# EAGLE board Skematik Sistem Minimum (EAGLE 9.6.2)
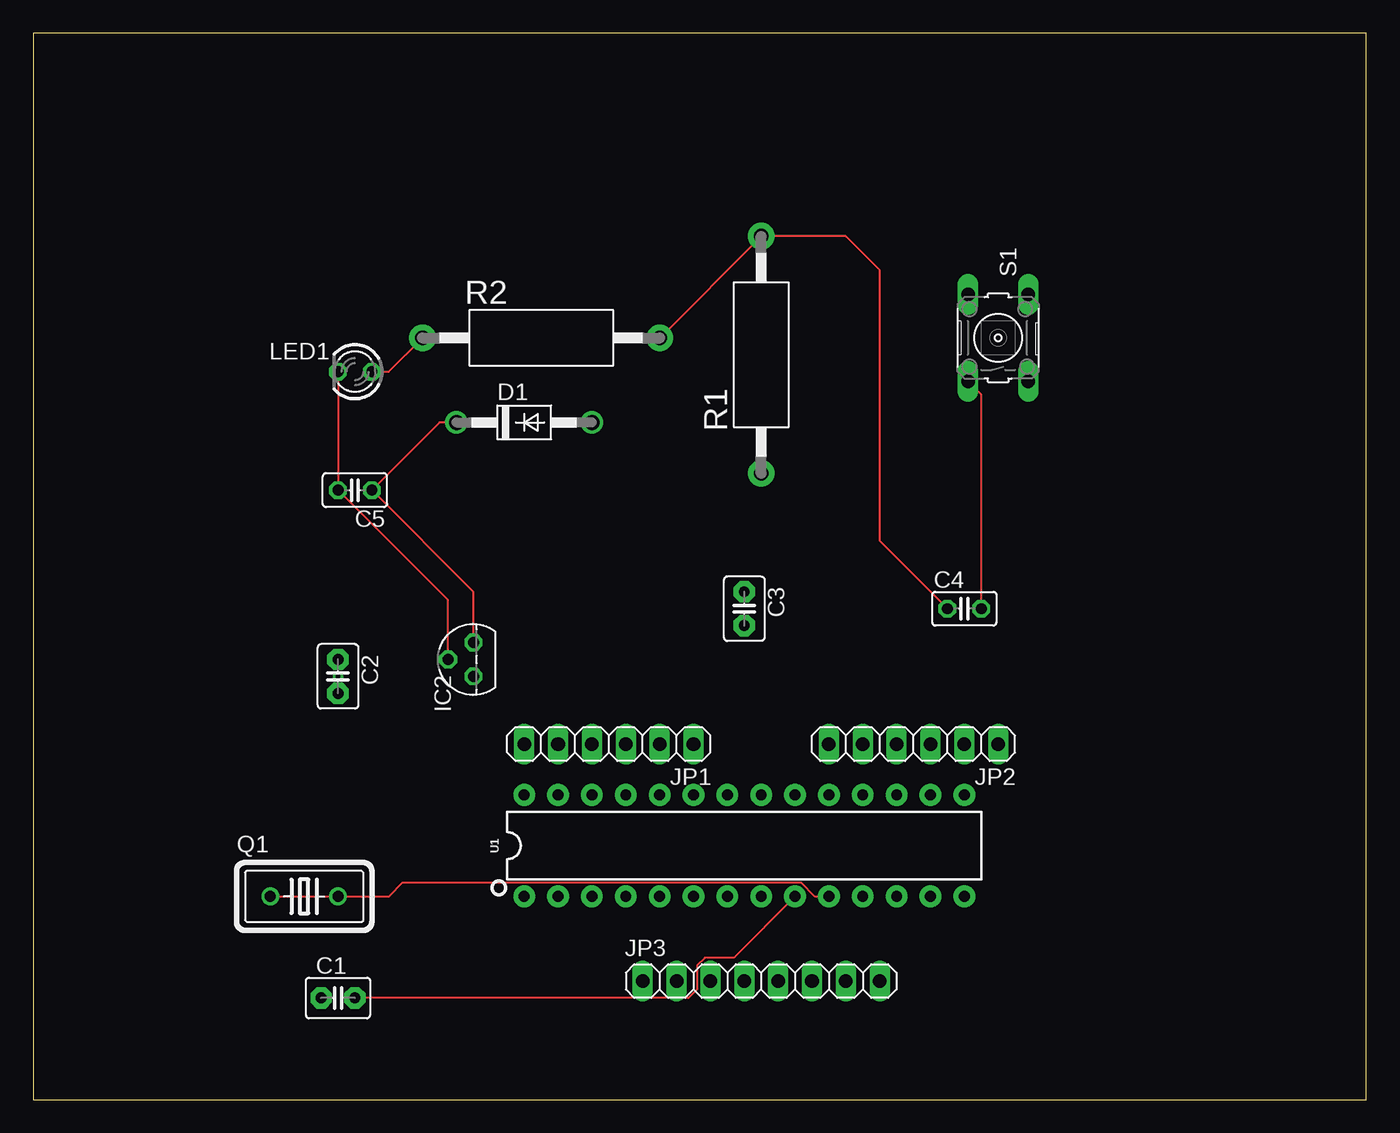
[diagram p0: board, top side]
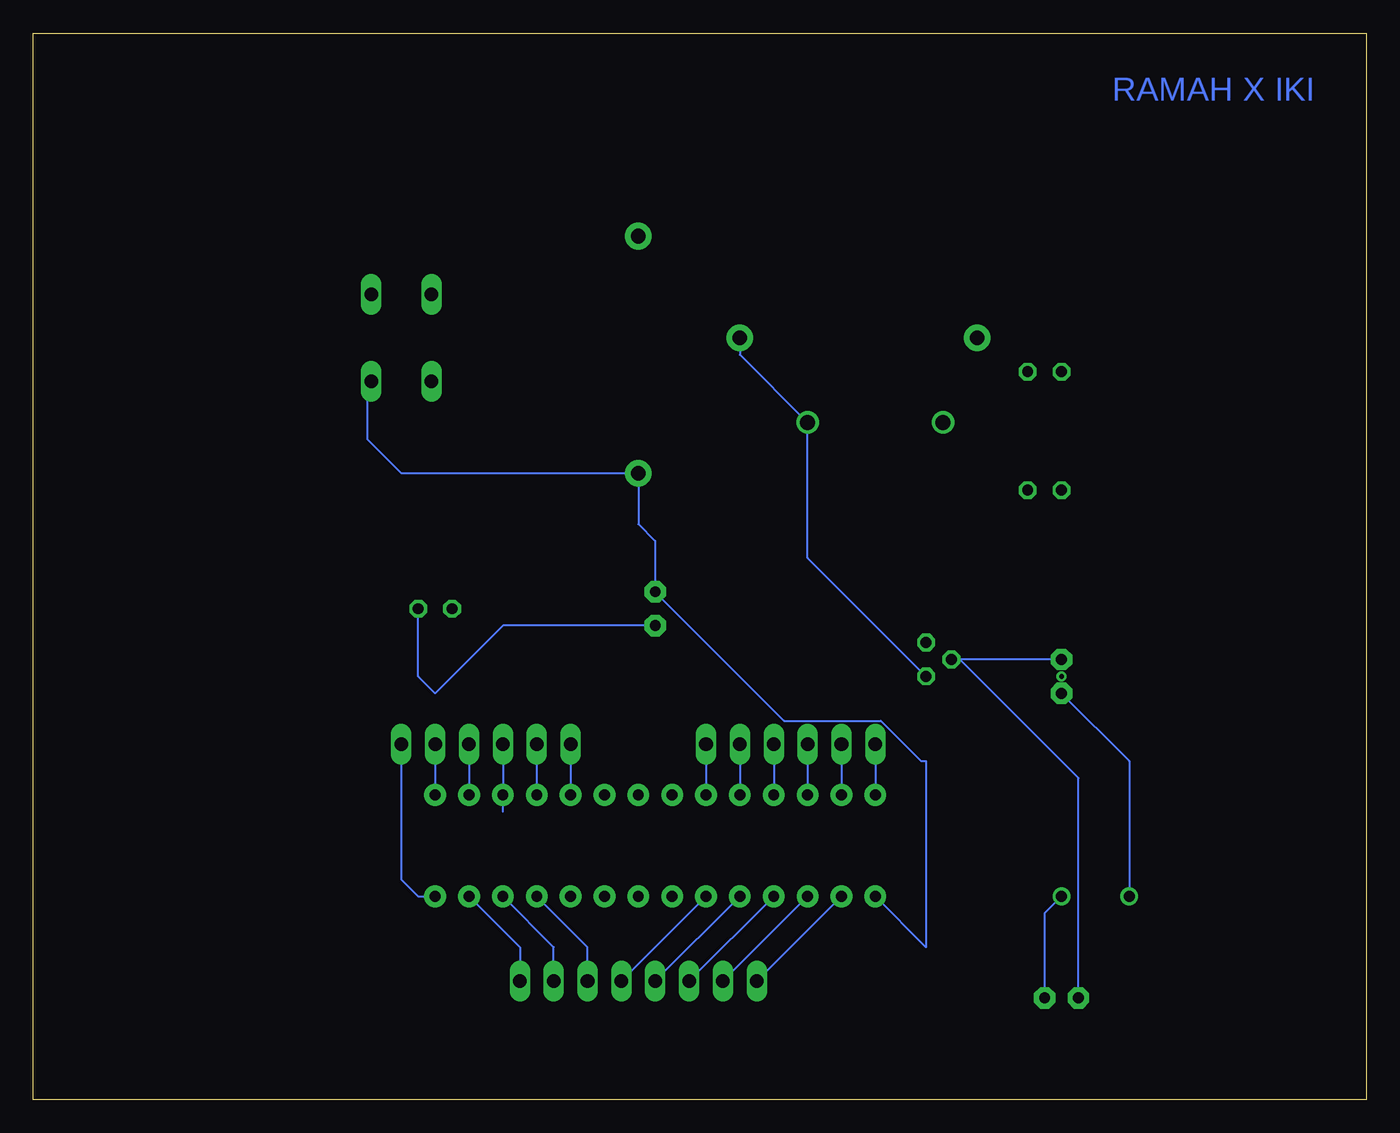
[diagram p1: board, bottom side, seen from below]

Size 100 x 80 mm. Coordinates in mm from the lower left corner, seen from the top.
Outline: 0,0 100,0 100,80 0,80 0,0
Copper layers (1*16): Top 0.035mm / dielectric 1.5mm / Bottom 0.035mm
Design rules "default": minimum track width 6mil, minimum drill 0.35mm, track to track 6mil, track to pad 6mil, pad to pad 6mil, via to via 6mil, smd to smd 6mil, copper to edge 40mil, drill to drill 6mil, minimum pad ring 10mil, minimum via ring 8mil, stop-mask expansion 4mil, vias tented up to drill 0mil, thermal gap 10mil

## Footprints (pad centres in the part's own frame; a part is rotated, then mirrored left to right if it is on the bottom)
C2.5-3 = drill 0.813 pad 1.6 octagon: 1 -1.27,0; 2 1.27,0
C025-025X050 = drill 0.813 octagon: 1 -1.27,0; 2 1.27,0
DO41-10 = drill 1.118: A 5.08,0; C -5.08,0
TO92 = drill 0.813 octagon: 1 -1.27,0; 2 0,1.905; 3 1.27,0
1X06 = drill 1.016 long: 1 -6.35,0; 2 -3.81,0; 3 -1.27,0; 4 1.27,0; 5 3.81,0; 6 6.35,0
1X08 = drill 1.016 long: 1 -8.89,0; 2 -6.35,0; 3 -3.81,0; 4 -1.27,0; 5 1.27,0; 6 3.81,0; 7 6.35,0; 8 8.89,0
LED3MM = drill 0.813 octagon: A -1.27,0; K 1.27,0
HC18U-V = drill 0.813: 1 -2.54,0; 2 2.54,0
AC01 = drill 1.1 pad 2: 1 -8.9,0; 2 8.9,0
B3F-10XX = drill 1.016 long: 1 -3.251,2.261; 2 3.251,2.261; 3 -3.251,-2.261; 4 3.251,-2.261
DIP28 = drill 0.813 pad 1.626: 1 -16.51,-3.81; 2 -13.97,-3.81; 3 -11.43,-3.81; 4 -8.89,-3.81; 5 -6.35,-3.81; 6 -3.81,-3.81; 7 -1.27,-3.81; 8 1.27,-3.81; 9 3.81,-3.81; 10 6.35,-3.81; 11 8.89,-3.81; 12 11.43,-3.81; 13 13.97,-3.81; 14 16.51,-3.81; 15 16.51,3.81; 16 13.97,3.81; 17 11.43,3.81; 18 8.89,3.81; 19 6.35,3.81; 20 3.81,3.81; 21 1.27,3.81; 22 -1.27,3.81; 23 -3.81,3.81; 24 -6.35,3.81; 25 -8.89,3.81; 26 -11.43,3.81; 27 -13.97,3.81; 28 -16.51,3.81

## Placement (x,y rotation side)
C1  [C2.5-3]  22.86,7.62 0 top
C2  [C2.5-3]  22.86,31.75 270 top
C3  [C2.5-3]  53.34,36.83 270 top
C4  [C025-025X050]  69.85,36.83 0 top
C5  [C025-025X050]  24.13,45.72 180 top
D1  1N4004  [DO41-10]  36.83,50.8 0 top
IC2  78L05Z  [TO92]  33.02,33.02 90 top
JP1  [1X06]  43.18,26.67 180 top
JP2  [1X06]  66.04,26.67 180 top
JP3  [1X08]  54.61,8.89 0 top
LED1  [LED3MM]  24.13,54.61 180 top
Q1  [HC18U-V]  20.32,15.24 0 top
R1  [AC01]  54.61,55.88 90 top
R2  [AC01]  38.1,57.15 0 top
S1  [B3F-10XX]  72.39,57.15 90 top
U1  328P  [DIP28]  53.34,19.05 0 top

## Library data of the parts
C1-C3 = capacitor-wima
C4 C5 = rcl; SPICEPREFIX: C
D1 = diode
IC2 = linear
JP1-JP3 = pinhead
LED1 = led
Q1 = crystal; OC_FARNELL: unknown; OC_NEWARK: unknown
R1 R2 = resistor-power; OC_FARNELL: unknown; OC_NEWARK: unknown
S1 = switch-omron; MPN: B3F-1000; OC_FARNELL: 176432; OC_NEWARK: 36M3542
U1 = SparkFun-IC-Microcontroller; PROD_ID: IC-09136

## Nets
GND: C1.1 C2.1 C5.2 IC2.2 LED1.K
N$1: JP1.1 U1.23
N$2: C1.2 Q1.2 U1.9
N$3: C2.2 Q1.1 U1.10
N$4: JP1.2 U1.24
N$5: JP1.3 U1.25
N$6: JP1.4 U1.26
N$7: JP1.5 U1.27
N$8: JP1.6 U1.28
N$9: JP3.1 U1.2
N$10: JP3.2 U1.3
N$11: JP3.3 U1.4
N$12: JP3.4 U1.5
N$13: JP3.5 U1.6
N$14: JP3.6 U1.11
N$15: JP3.7 U1.12
N$16: JP3.8 U1.13
N$25: JP2.1 U1.14
N$26: JP2.2 U1.15
N$27: JP2.3 U1.16
N$28: JP2.4 U1.17
N$29: JP2.5 U1.18
N$30: JP2.6 U1.19
N$34: C3.1 R1.1 S1.3 U1.1
N$36: LED1.A R2.1
N$37: C3.2 C4.2 S1.1
N$38: C5.1 D1.C IC2.3
VCC: C4.1 D1.A IC2.1 R1.2 R2.2

## Tracks (layer width: path | path; a pad name or v marks a point on that pad's centre or on a via)
GND
  Top 0.152: IC2.2 31.11,37.47 C5.2 LED1.K
  Bottom 0.152: C2.1 30.48,33.02 | 30.48,33.02 IC2.2 | C1.1 21.59,24.13 30.48,33.02
N$1
  Bottom 0.152: JP1.1 U1.23
N$2
  Top 0.152: U1.9 52.55,10.64 50.39,10.64 49.81,10.06 49.81,8.28 49.15,7.62 C1.2
  Bottom 0.152: Q1.2 24.13,13.97 C1.2
N$3
  Top 0.152: Q1.1 26.68,15.24 27.72,16.28 57.58,16.28 58.62,15.24 U1.10
  Bottom 0.152: C2.2 17.78,25.4 Q1.1
N$4
  Bottom 0.152: JP1.2 U1.24
N$5
  Bottom 0.152: JP1.3 U1.25
N$6
  Bottom 0.152: JP1.4 U1.26
N$7
  Bottom 0.152: JP1.5 U1.27
N$8
  Bottom 0.152: JP1.6 U1.28
N$9
  Bottom 0.152: JP3.1 U1.2
N$10
  Bottom 0.152: JP3.2 U1.3
N$11
  Bottom 0.152: JP3.3 U1.4
N$12
  Bottom 0.152: JP3.4 U1.5
N$13
  Bottom 0.152: JP3.5 U1.6
N$14
  Bottom 0.152: JP3.6 58.42,11.43 U1.11
N$15
  Bottom 0.152: JP3.7 60.96,11.43 U1.12
N$16
  Bottom 0.152: U1.13 63.5,11.43 JP3.8
N$17  (via drill 0.35)
  other vias: 22.86,31.75
N$25
  Bottom 0.152: JP2.1 72.39,16.51 71.12,15.24 U1.14
N$26
  Bottom 0.152: JP2.2 U1.15
N$27
  Bottom 0.152: JP2.3 U1.16
N$28
  Bottom 0.152: JP2.4 U1.17 64.77,21.59
N$29
  Bottom 0.152: JP2.5 U1.18
N$30
  Bottom 0.152: JP2.6 U1.19
N$34
  Bottom 0.152: S1.3 74.93,53.9 74.93,49.53 72.38,46.98 R1.1 54.61,43.18 53.34,41.91 C3.1 43.66,28.42 36.42,28.42 33.4,25.4 33.02,25.4 33.02,11.43 U1.1
N$36
  Top 0.152: R2.1 26.66,54.61 LED1.A
N$37
  Top 0.152: C4.2 71.12,52.91 S1.1
  Bottom 0.152: C3.2 64.77,35.56 69.85,30.48 71.12,31.75 C4.2
N$38
  Top 0.152: IC2.3 33.02,38.1 C5.1 30.48,50.8 D1.C
VCC
  Top 0.152: R2.2 54.61,64.76 R1.2 60.96,64.77 63.5,62.23 63.5,41.91 C4.1
  Bottom 0.152: IC2.1 41.91,40.64 D1.A 47,55.89 R2.2

## Text on the board
Bottom: RAMAH X IKI